# Altium PCB 64XkeysPcb.PcbDoc
Units mil, origin at the board's own origin, x right, y up, seen from the top; angles counter-clockwise.
Board outline 6000 x 4000 mil, 2 copper layers (Top Layer, Bottom Layer); 82 components, 82 nets, 402 pads, 0 vias.
Unrouted connection lines stored in the file: 200.
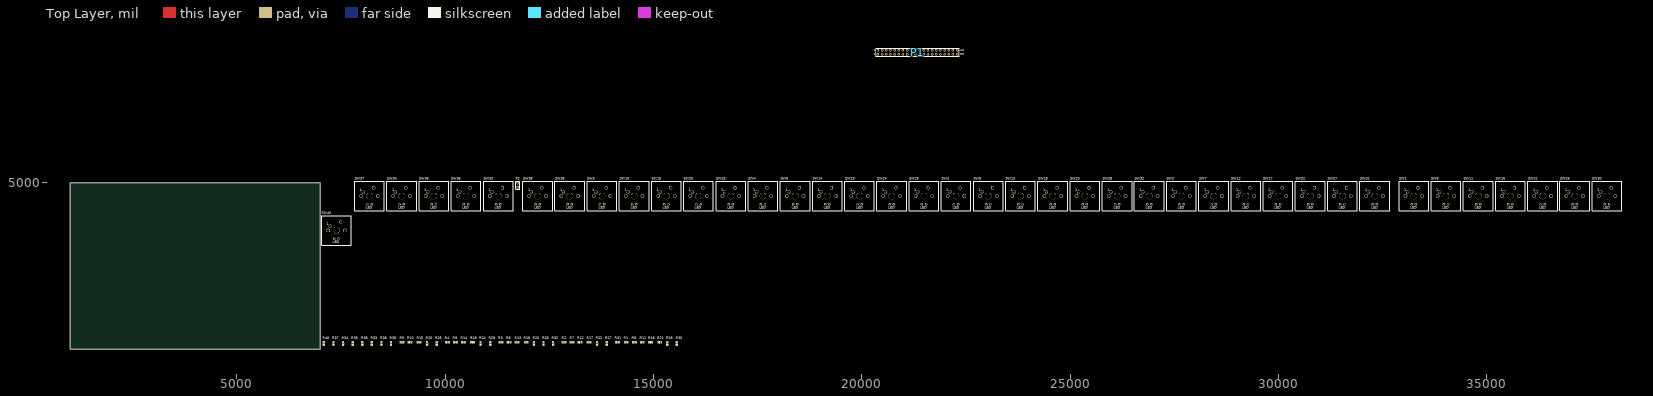
[diagram p0: Top Layer view]
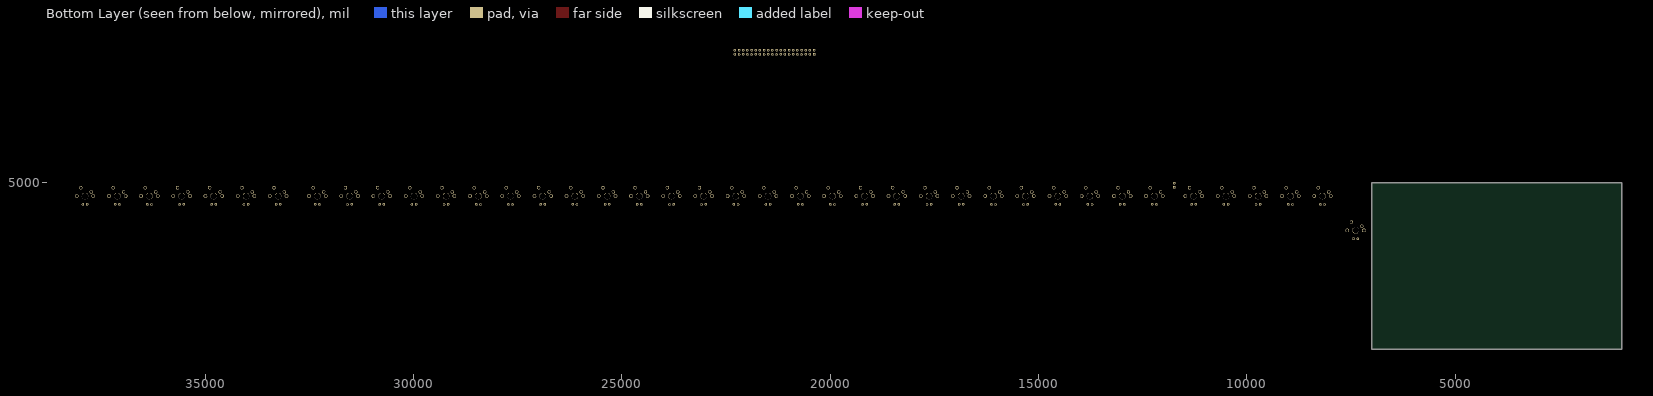
[diagram p1: Bottom Layer view, seen from below]

## Layer stack, top to bottom
Top Solder: solder mask 0.4, Solder Resist, Dk 3.5
Top Layer: signal copper 1.4
Dielectric 1: dielectric 12.6, FR-4, Dk 4.8
Bottom Layer: signal copper 1.4
Bottom Solder: solder mask 0.4, Solder Resist, Dk 3.5

## Board outline
1000,1000 7000,1000 7000,5000 1000,5000

## Design rules (kind name [scope] priority, off if disabled: settings)
Clearance [All] p1: gap=10
PolygonConnect [All] p1: connectstyle=Relief reliefconductorwidth=10 reliefentries=4 polygonreliefangle="90 Angle" airgapwidth=10
RoomDefinition 64XkeySchem [InComponentClass('64XkeySchem')] p1: confinementstyle=ConfineIn formatcopy=TRUE lockcomponents=FALSE outline 7045,1060 38250,1060 38250,5145 7045,5145
RoutingVias [All] p1: holewidth=28 width=50 viastyle="Through Hole" minholewidth=28 minwidth=50 maxholewidth=28 maxwidth=50
SolderMaskExpansion [All] p1: expansion=4
Width [All] p1: maxlimit=10 minlimit=10 preferedwidth=10
30 further rules are at their usual default settings.

## Components (designator, comment, footprint, x,y, rotation, side; value= is the part's Value field where it differs from the comment)
P1 "Header 20X2" HDR2X20 20385,8075 r0 top
P2 "Header 2" HDR1X2 11740,4885 r90 top
R1 "Res Semi" 6-0805_N 14345,1170 r0 top
R2 "Res Semi" 6-0805_N 12855,1170 r0 top
R3 "Res Semi" 6-0805_N 11340,1170 r0 top
R4 "Res Semi" 6-0805_N 10055,1170 r0 top
R5 "Res Semi" 6-0805_N 8965,1170 r0 top
R6 "Res Semi" 6-0805_N 14540,1170 r0 top
R7 "Res Semi" 6-0805_N 13045,1170 r0 top
R8 "Res Semi" 6-0805_N 11530,1170 r0 top
R9 "Res Semi" 6-0805_N 10245,1170 r0 top
R10 "Res Semi" 6-0805_N 9155,1170 r0 top
R11 "Res Semi" 6-0805_N 14730,1170 r0 top
R12 "Res Semi" 6-0805_N 13235,1170 r0 top
R13 "Res Semi" 6-0805_N 11725,1170 r0 top
R14 "Res Semi" 6-0805_N 10440,1170 r0 top
R15 "Res Semi" 6-0805_N 9375,1170 r0 top
R16 "Res Semi" 6-0805_N 14930,1170 r0 top
R17 "Res Semi" 6-0805_N 13455,1170 r0 top
R18 "Res Semi" 6-0805_N 11945,1170 r0 top
R19 "Res Semi" 6-0805_N 10660,1170 r0 top
R20 "Res Semi" 6-0805_N 9565,1135 r90 top
R21 "Res Semi" 6-0805_N 15150,1170 r0 top
R22 "Res Semi" 6-0805_N 13645,1135 r90 top
R23 "Res Semi" 6-0805_N 12130,1135 r90 top
R24 "Res Semi" 6-0805_N 10850,1135 r90 top
R25 "Res Semi" 6-0805_N 9795,1135 r90 top
R26 "Res Semi" 6-0805_N 15330,1135 r90 top
R27 "Res Semi" 6-0805_N 13875,1135 r90 top
R28 "Res Semi" 6-0805_N 12360,1135 r90 top
R29 "Res Semi" 6-0805_N 11080,1135 r90 top
R30 "Res Semi" 6-0805_N 15560,1135 r90 top
R31 "Res Semi" 6-0805_N 14135,1170 r0 top
R32 "Res Semi" 6-0805_N 12590,1135 r90 top
R33 "Res Semi" 6-0805_N 8240,1135 r90 top
R34 "Res Semi" 6-0805_N 7550,1135 r90 top
R35 "Res Semi" 6-0805_N 8700,1135 r90 top
R36 "Res Semi" 6-0805_N 8010,1135 r90 top
R37 "Res Semi" 6-0805_N 7320,1135 r90 top
R38 "Res Semi" 6-0805_N 8470,1135 r90 top
R39 "Res Semi" 6-0805_N 7780,1135 r90 top
R40 "Res Semi" 6-0805_N 7090,1135 r90 top
SW1 "CherrySwitch" CherryMxSwitch 33095,4775 r0 top
SW2 "CherrySwitch" CherryMxSwitch 27520,4775 r0 top
SW3 "CherrySwitch" CherryMxSwitch 22110,4775 r0 top
SW4 "CherrySwitch" CherryMxSwitch 17475,4775 r0 top
SW5 "CherrySwitch" CherryMxSwitch 13615,4775 r0 top
SW6 "CherrySwitch" CherryMxSwitch 33865,4775 r0 top
SW7 "CherrySwitch" CherryMxSwitch 28290,4775 r0 top
SW8 "CherrySwitch" CherryMxSwitch 22885,4775 r0 top
SW9 "CherrySwitch" CherryMxSwitch 18250,4775 r0 top
SW10 "CherrySwitch" CherryMxSwitch 14385,4775 r0 top
SW11 "CherrySwitch" CherryMxSwitch 34640,4775 r0 top
SW12 "CherrySwitch" CherryMxSwitch 29065,4775 r0 top
SW13 "CherrySwitch" CherryMxSwitch 23655,4775 r0 top
SW14 "CherrySwitch" CherryMxSwitch 19020,4775 r0 top
SW15 "CherrySwitch" CherryMxSwitch 15160,4775 r0 top
SW16 "CherrySwitch" CherryMxSwitch 35410,4775 r0 top
SW17 "CherrySwitch" CherryMxSwitch 29835,4775 r0 top
SW18 "CherrySwitch" CherryMxSwitch 24430,4775 r0 top
SW19 "CherrySwitch" CherryMxSwitch 19795,4775 r0 top
SW20 "CherrySwitch" CherryMxSwitch 15930,4775 r0 top
SW21 "CherrySwitch" CherryMxSwitch 36185,4775 r0 top
SW22 "CherrySwitch" CherryMxSwitch 30610,4775 r0 top
SW23 "CherrySwitch" CherryMxSwitch 25200,4775 r0 top
SW24 "CherrySwitch" CherryMxSwitch 20565,4775 r0 top
SW25 "CherrySwitch" CherryMxSwitch 16705,4775 r0 top
SW26 "CherrySwitch" CherryMxSwitch 36955,4775 r0 top
SW27 "CherrySwitch" CherryMxSwitch 31380,4775 r0 top
SW28 "CherrySwitch" CherryMxSwitch 25975,4775 r0 top
SW29 "CherrySwitch" CherryMxSwitch 21340,4775 r0 top
SW30 "CherrySwitch" CherryMxSwitch 37730,4775 r0 top
SW31 "CherrySwitch" CherryMxSwitch 32155,4775 r0 top
SW32 "CherrySwitch" CherryMxSwitch 26745,4775 r0 top
SW33 "CherrySwitch" CherryMxSwitch 11125,4775 r0 top
SW34 "CherrySwitch" CherryMxSwitch 8805,4775 r0 top
SW35 "CherrySwitch" CherryMxSwitch 12840,4775 r0 top
SW36 "CherrySwitch" CherryMxSwitch 10350,4775 r0 top
SW37 "CherrySwitch" CherryMxSwitch 8035,4775 r0 top
SW38 "CherrySwitch" CherryMxSwitch 12070,4775 r0 top
SW39 "CherrySwitch" CherryMxSwitch 9580,4775 r0 top
SW40 "CherrySwitch" CherryMxSwitch 7240,3950 r0 top

## Footprints (in the part's own frame and the unit in brackets; to place one, negate y for a bottom-side part, rotate by r counter-clockwise, add the part's x,y. Pads: shape width x height; smd on the part's side, far side on the other; paste and mask are expansions set on the pad)
6-0805_N [mm] "Chip Resistor, Body 2.0x1.2mm, IPC Medium Density"
  rect 1.2x1.4 smd: 1(-0.9,0) 2(0.9,0)
  silkscreen extent 0,-0.6 0,0.6, body extent -1.07,-0.7 1.07,0.7, height 0.7
CherryMxSwitch [mil] "Cherry Mx Switch with holes for LED"
  round 80 hole 59: 1(0,0) 2(250,100)
  round 60 hole 39: 3(100,-300) 4(200,-300)
  round 87 hole 67: 5(-50,-100) 7(350,-100)
  round 157 hole 157 unplated: 6(150,-100)
  silkscreen extent -205,-458 508,255
HDR1X2 [mm] "Connector; Header; 2 Position"
  rect 1.5x1.5 hole 0.9: 1(0,0)
  round 1.5 hole 0.9: 2(2.54,0)
  silkscreen extent -1.27,-1.27 3.81,1.27
HDR2X20 [mm] "Connector; Header; 20x2 Position"
  rect 1.5x1.5 hole 0.9: 1(0,0)
  round 1.5 hole 0.9: 2(0,2.54) 3(2.54,0) 4(2.54,2.54) 5(5.08,0) 6(5.08,2.54) 7(7.62,0) 8(7.62,2.54) 9(10.16,0) 10(10.16,2.54) 11(12.7,0) 12(12.7,2.54) 13(15.24,0) 14(15.24,2.54) 15(17.78,0) 16(17.78,2.54) 17(20.32,0) 18(20.32,2.54) 19(22.86,0) 20(22.86,2.54) 21(25.4,0) 22(25.4,2.54) 23(27.94,0) 24(27.94,2.54) 25(30.48,0) 26(30.48,2.54) 27(33.02,0) 28(33.02,2.54) 29(35.56,0) 30(35.56,2.54) 31(38.1,0) 32(38.1,2.54) 33(40.64,0) 34(40.64,2.54) 35(43.18,0) 36(43.18,2.54) 37(45.72,0) 38(45.72,2.54) 39(48.26,0) 40(48.26,2.54)
  silkscreen extent -1.27,-1.27 49.53,3.81

## Part data
P1: "Header, 20-Pin, Dual row"
P2: "Header, 2-Pin"
R1 R2 R3 R4 R5 R6 R7 R8 R9 R10 R11 R12 R13 R14 R15 R16 R17 R18 R19 R20 R21 R22 R23 R24 R25 R26 R27 R28 R29 R30 R31 R32 R33 R34 R35 R36 R37 R38 R39 R40: "Semiconductor Resistor"
SW1 SW2 SW3 SW4 SW5 SW6 SW7 SW8 SW9 SW10 SW11 SW12 SW13 SW14 SW15 SW16 SW17 SW18 SW19 SW20 SW21 SW22 SW23 SW24 SW25 SW26 SW27 SW28 SW29 SW30 SW31 SW32 SW33 SW34 SW35 SW36 SW37 SW38 SW39 SW40: "Cherry MX Switch layout"

## Nets (pads, with @x,y where several pads share a name; then routed paths per layer and width w, separated by ;. In a path a pad name is that pad's centre, name@x,y a point inside that pad or via, vN(x,y) a via of type N, cw(c..) or ccw(c..) an arc to the next point about the centre after c; other vN are vias at no path point)
GND: P2.2 SW1.2 SW1.4 SW2.2 SW2.4 SW3.2 SW3.4 SW4.2 SW4.4 SW5.2 SW5.4 SW6.2 SW6.4 SW7.2 SW7.4 SW8.2 SW8.4 SW9.2 SW9.4 SW10.2 SW10.4 SW11.2 SW11.4 SW12.2 SW12.4 SW13.2 SW13.4 SW14.2 SW14.4 SW15.2 SW15.4 SW16.2 SW16.4 SW17.2 SW17.4 SW18.2 SW18.4 SW19.2 SW19.4 SW20.2 SW20.4 SW21.2 SW21.4 SW22.2 SW22.4 SW23.2 SW23.4 SW24.2 SW24.4 SW25.2 SW25.4 SW26.2 SW26.4 SW27.2 SW27.4 SW28.2 SW28.4 SW29.2 SW29.4 SW30.2 SW30.4 SW31.2 SW31.4 SW32.2 SW32.4 SW33.2 SW33.4 SW34.2 SW34.4 SW35.2 SW35.4 SW36.2 SW36.4 SW37.2 SW37.4 SW38.2 SW38.4 SW39.2 SW39.4 SW40.2 SW40.4
KEY1: P1.1 SW1.1
KEY2: P1.2 SW2.1
KEY3: P1.3 SW3.1
KEY4: P1.4 SW4.1
KEY5: P1.5 SW5.1
KEY6: P1.6 SW6.1
KEY7: P1.7 SW7.1
KEY8: P1.8 SW8.1
KEY9: P1.9 SW9.1
KEY10: P1.10 SW10.1
KEY11: P1.11 SW11.1
KEY12: P1.12 SW12.1
KEY13: P1.13 SW13.1
KEY14: P1.14 SW14.1
KEY15: P1.15 SW15.1
KEY16: P1.16 SW16.1
KEY17: P1.17 SW17.1
KEY18: P1.18 SW18.1
KEY19: P1.19 SW19.1
KEY20: P1.20
KEY21: P1.21 SW21.1
KEY22: P1.22 SW22.1
KEY23: P1.23 SW23.1
KEY24: P1.24 SW24.1
KEY25: P1.25 SW20.1 SW25.1
KEY26: P1.26 SW26.1
KEY27: P1.27 SW27.1
KEY28: P1.28 SW28.1
KEY29: P1.29 SW29.1
KEY30: P1.30 SW30.1
KEY31: P1.31 SW31.1
KEY32: P1.32 SW32.1
KEY33: P1.33 SW33.1
KEY34: P1.34 SW34.1
KEY35: P1.35 SW35.1
KEY36: P1.36 SW36.1
KEY37: P1.37 SW37.1
KEY38: P1.38 SW38.1
KEY39: P1.39 SW39.1
KEY40: P1.40 SW40.1
NetR1_2: R1.2 SW1.3
NetR2_2: R2.2 SW2.3
NetR3_2: R3.2 SW3.3
NetR4_2: R4.2 SW4.3
NetR5_2: R5.2 SW5.3
NetR6_2: R6.2 SW6.3
NetR7_2: R7.2 SW7.3
NetR8_2: R8.2 SW8.3
NetR9_2: R9.2 SW9.3
NetR10_2: R10.2 SW10.3
NetR11_2: R11.2 SW11.3
NetR12_2: R12.2 SW12.3
NetR13_2: R13.2 SW13.3
NetR14_2: R14.2 SW14.3
NetR15_2: R15.2 SW15.3
NetR16_2: R16.2 SW16.3
NetR17_2: R17.2 SW17.3
NetR18_2: R18.2 SW18.3
NetR19_2: R19.2 SW19.3
NetR20_2: R20.2 SW20.3
NetR21_2: R21.2 SW21.3
NetR22_2: R22.2 SW22.3
NetR23_2: R23.2 SW23.3
NetR24_2: R24.2 SW24.3
NetR25_2: R25.2 SW25.3
NetR26_2: R26.2 SW26.3
NetR27_2: R27.2 SW27.3
NetR28_2: R28.2 SW28.3
NetR29_2: R29.2 SW29.3
NetR30_2: R30.2 SW30.3
NetR31_2: R31.2 SW31.3
NetR32_2: R32.2 SW32.3
NetR33_2: R33.2 SW33.3
NetR34_2: R34.2 SW34.3
NetR35_2: R35.2 SW35.3
NetR36_2: R36.2 SW36.3
NetR37_2: R37.2 SW37.3
NetR38_2: R38.2 SW38.3
NetR39_2: R39.2 SW39.3
NetR40_2: R40.2 SW40.3
VCC: P2.1 R1.1 R2.1 R3.1 R4.1 R5.1 R6.1 R7.1 R8.1 R9.1 R10.1 R11.1 R12.1 R13.1 R14.1 R15.1 R16.1 R17.1 R18.1 R19.1 R20.1 R21.1 R22.1 R23.1 R24.1 R25.1 R26.1 R27.1 R28.1 R29.1 R30.1 R31.1 R32.1 R33.1 R34.1 R35.1 R36.1 R37.1 R38.1 R39.1 R40.1
pads on no net: SW1.5 SW1.6 SW1.7 SW2.5 SW2.6 SW2.7 SW3.5 SW3.6 SW3.7 SW4.5 SW4.6 SW4.7 SW5.5 SW5.6 SW5.7 SW6.5 SW6.6 SW6.7 SW7.5 SW7.6 SW7.7 SW8.5 SW8.6 SW8.7 SW9.5 SW9.6 SW9.7 SW10.5 SW10.6 SW10.7 SW11.5 SW11.6 SW11.7 SW12.5 SW12.6 SW12.7 SW13.5 SW13.6 SW13.7 SW14.5 SW14.6 SW14.7 SW15.5 SW15.6 SW15.7 SW16.5 SW16.6 SW16.7 SW17.5 SW17.6 SW17.7 SW18.5 SW18.6 SW18.7 SW19.5 SW19.6 SW19.7 SW20.5 SW20.6 SW20.7 SW21.5 SW21.6 SW21.7 SW22.5 SW22.6 SW22.7 SW23.5 SW23.6 SW23.7 SW24.5 SW24.6 SW24.7 SW25.5 SW25.6 SW25.7 SW26.5 SW26.6 SW26.7 SW27.5 SW27.6 SW27.7 SW28.5 SW28.6 SW28.7 SW29.5 SW29.6 SW29.7 SW30.5 SW30.6 SW30.7 SW31.5 SW31.6 SW31.7 SW32.5 SW32.6 SW32.7 SW33.5 SW33.6 SW33.7 SW34.5 SW34.6 SW34.7 SW35.5 SW35.6 SW35.7 SW36.5 SW36.6 SW36.7 SW37.5 SW37.6 SW37.7 SW38.5 SW38.6 SW38.7 SW39.5 SW39.6 SW39.7 SW40.5 SW40.6 SW40.7

## Text inside footprints (layer, text, board x,y; h text height)
P1: Top Overlay "1" at 20285,8055 h50; Top Overlay "2" at 20285,8155 h50; Top Overlay "40" at 22365,8155 h50; Top Overlay "39" at 22365,8055 h50
SW1: Top Overlay "LED" at 33160,4365 h60; Top Overlay "1" at 33015,4795 h60
SW2: Top Overlay "LED" at 27585,4365 h60; Top Overlay "1" at 27440,4795 h60
SW3: Top Overlay "LED" at 22175,4365 h60; Top Overlay "1" at 22030,4795 h60
SW4: Top Overlay "LED" at 17540,4365 h60; Top Overlay "1" at 17395,4795 h60
SW5: Top Overlay "LED" at 13680,4365 h60; Top Overlay "1" at 13535,4795 h60
SW6: Top Overlay "LED" at 33930,4365 h60; Top Overlay "1" at 33785,4795 h60
SW7: Top Overlay "LED" at 28355,4365 h60; Top Overlay "1" at 28210,4795 h60
SW8: Top Overlay "LED" at 22950,4365 h60; Top Overlay "1" at 22805,4795 h60
SW9: Top Overlay "LED" at 18315,4365 h60; Top Overlay "1" at 18170,4795 h60
SW10: Top Overlay "LED" at 14450,4365 h60; Top Overlay "1" at 14305,4795 h60
SW11: Top Overlay "LED" at 34705,4365 h60; Top Overlay "1" at 34560,4795 h60
SW12: Top Overlay "LED" at 29130,4365 h60; Top Overlay "1" at 28985,4795 h60
SW13: Top Overlay "LED" at 23720,4365 h60; Top Overlay "1" at 23575,4795 h60
SW14: Top Overlay "LED" at 19085,4365 h60; Top Overlay "1" at 18940,4795 h60
SW15: Top Overlay "LED" at 15225,4365 h60; Top Overlay "1" at 15080,4795 h60
SW16: Top Overlay "LED" at 35475,4365 h60; Top Overlay "1" at 35330,4795 h60
SW17: Top Overlay "LED" at 29900,4365 h60; Top Overlay "1" at 29755,4795 h60
SW18: Top Overlay "LED" at 24495,4365 h60; Top Overlay "1" at 24350,4795 h60
SW19: Top Overlay "LED" at 19860,4365 h60; Top Overlay "1" at 19715,4795 h60
SW20: Top Overlay "LED" at 15995,4365 h60; Top Overlay "1" at 15850,4795 h60
SW21: Top Overlay "LED" at 36250,4365 h60; Top Overlay "1" at 36105,4795 h60
SW22: Top Overlay "LED" at 30675,4365 h60; Top Overlay "1" at 30530,4795 h60
SW23: Top Overlay "LED" at 25265,4365 h60; Top Overlay "1" at 25120,4795 h60
SW24: Top Overlay "LED" at 20630,4365 h60; Top Overlay "1" at 20485,4795 h60
SW25: Top Overlay "LED" at 16770,4365 h60; Top Overlay "1" at 16625,4795 h60
SW26: Top Overlay "LED" at 37020,4365 h60; Top Overlay "1" at 36875,4795 h60
SW27: Top Overlay "LED" at 31445,4365 h60; Top Overlay "1" at 31300,4795 h60
SW28: Top Overlay "LED" at 26040,4365 h60; Top Overlay "1" at 25895,4795 h60
SW29: Top Overlay "LED" at 21405,4365 h60; Top Overlay "1" at 21260,4795 h60
SW30: Top Overlay "LED" at 37795,4365 h60; Top Overlay "1" at 37650,4795 h60
SW31: Top Overlay "LED" at 32220,4365 h60; Top Overlay "1" at 32075,4795 h60
SW32: Top Overlay "LED" at 26810,4365 h60; Top Overlay "1" at 26665,4795 h60
SW33: Top Overlay "LED" at 11190,4365 h60; Top Overlay "1" at 11045,4795 h60
SW34: Top Overlay "LED" at 8870,4365 h60; Top Overlay "1" at 8725,4795 h60
SW35: Top Overlay "LED" at 12905,4365 h60; Top Overlay "1" at 12760,4795 h60
SW36: Top Overlay "LED" at 10415,4365 h60; Top Overlay "1" at 10270,4795 h60
SW37: Top Overlay "LED" at 8100,4365 h60; Top Overlay "1" at 7955,4795 h60
SW38: Top Overlay "LED" at 12135,4365 h60; Top Overlay "1" at 11990,4795 h60
SW39: Top Overlay "LED" at 9645,4365 h60; Top Overlay "1" at 9500,4795 h60
SW40: Top Overlay "LED" at 7305,3540 h60; Top Overlay "1" at 7160,3970 h60